# Altium PCB e3_tp2_ej4.PcbDoc
Units mm, origin at the board's own origin, x right, y up, seen from the top; angles counter-clockwise.
Board outline 50.04 x 50 mm, 2 copper layers (Top Layer, Bottom Layer); 18 components, 15 nets, 60 pads, 0 vias.
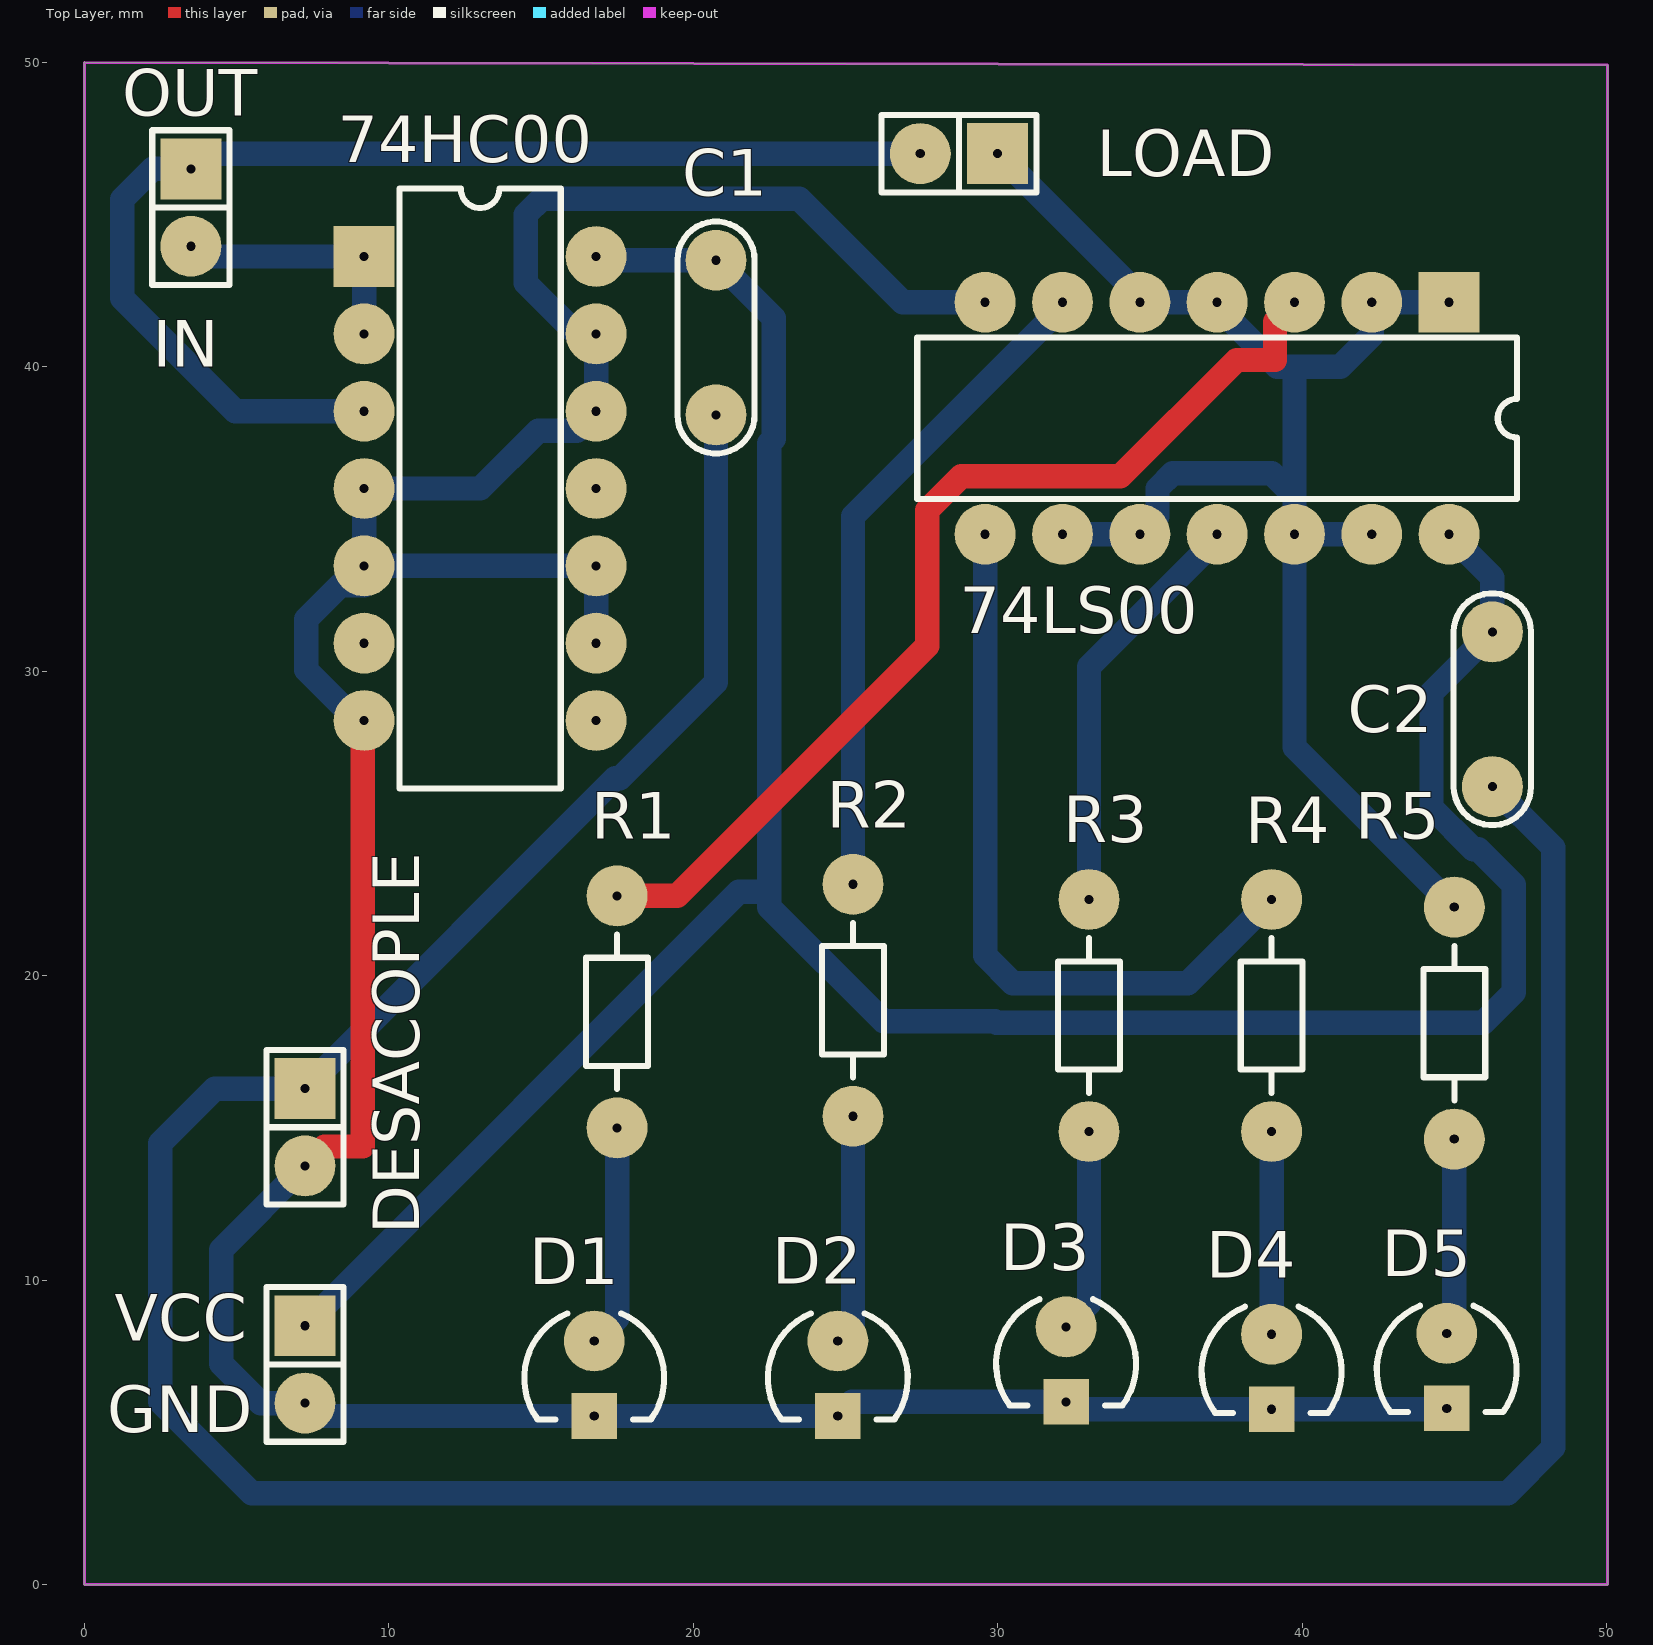
[diagram p0: Top Layer view]
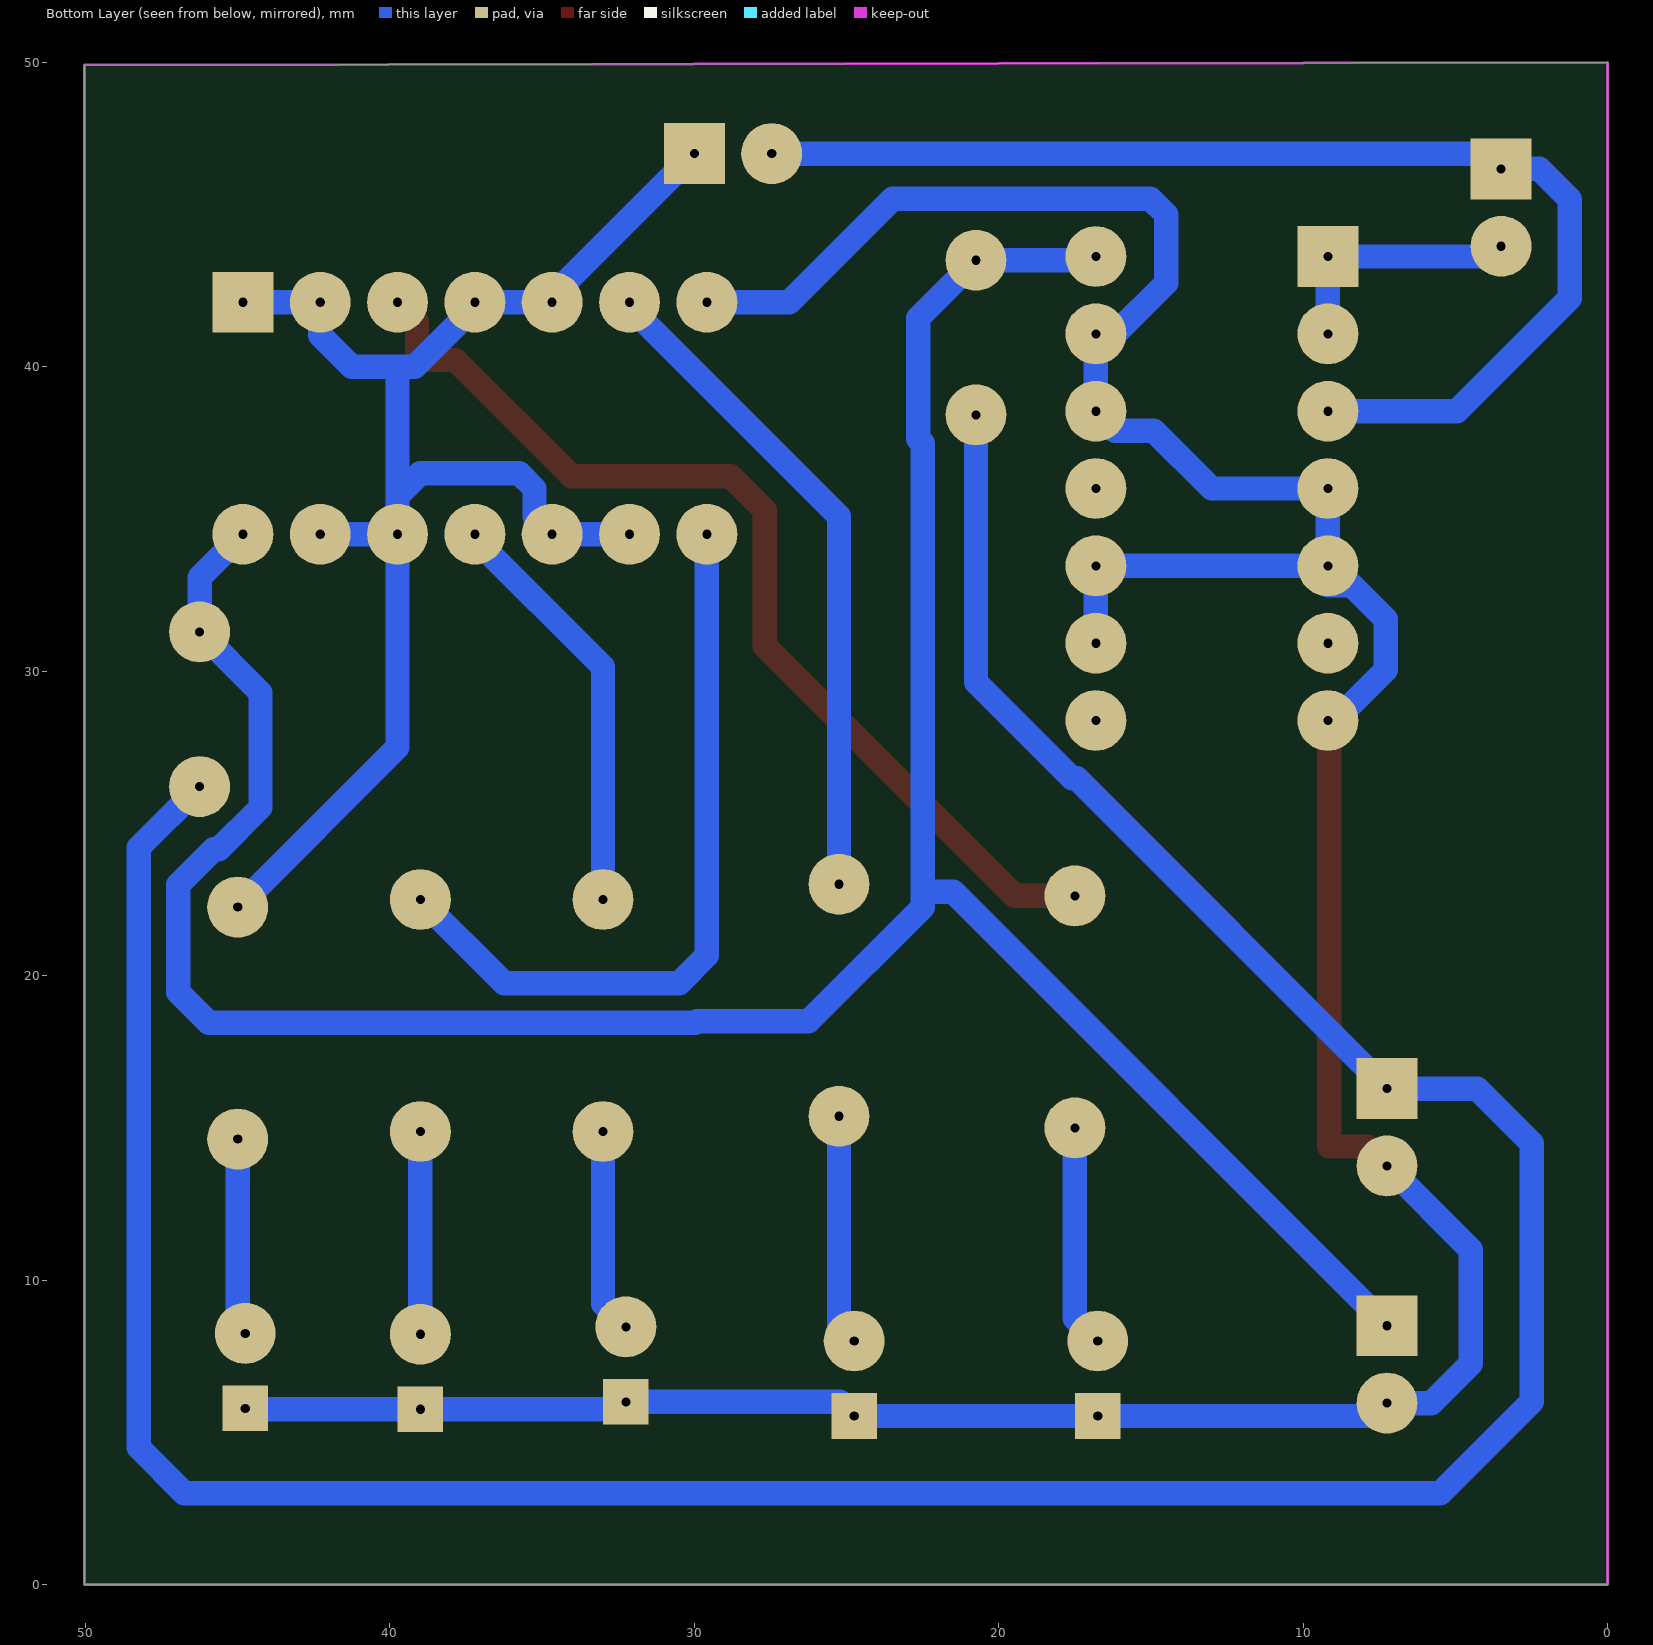
[diagram p1: Bottom Layer view, seen from below]
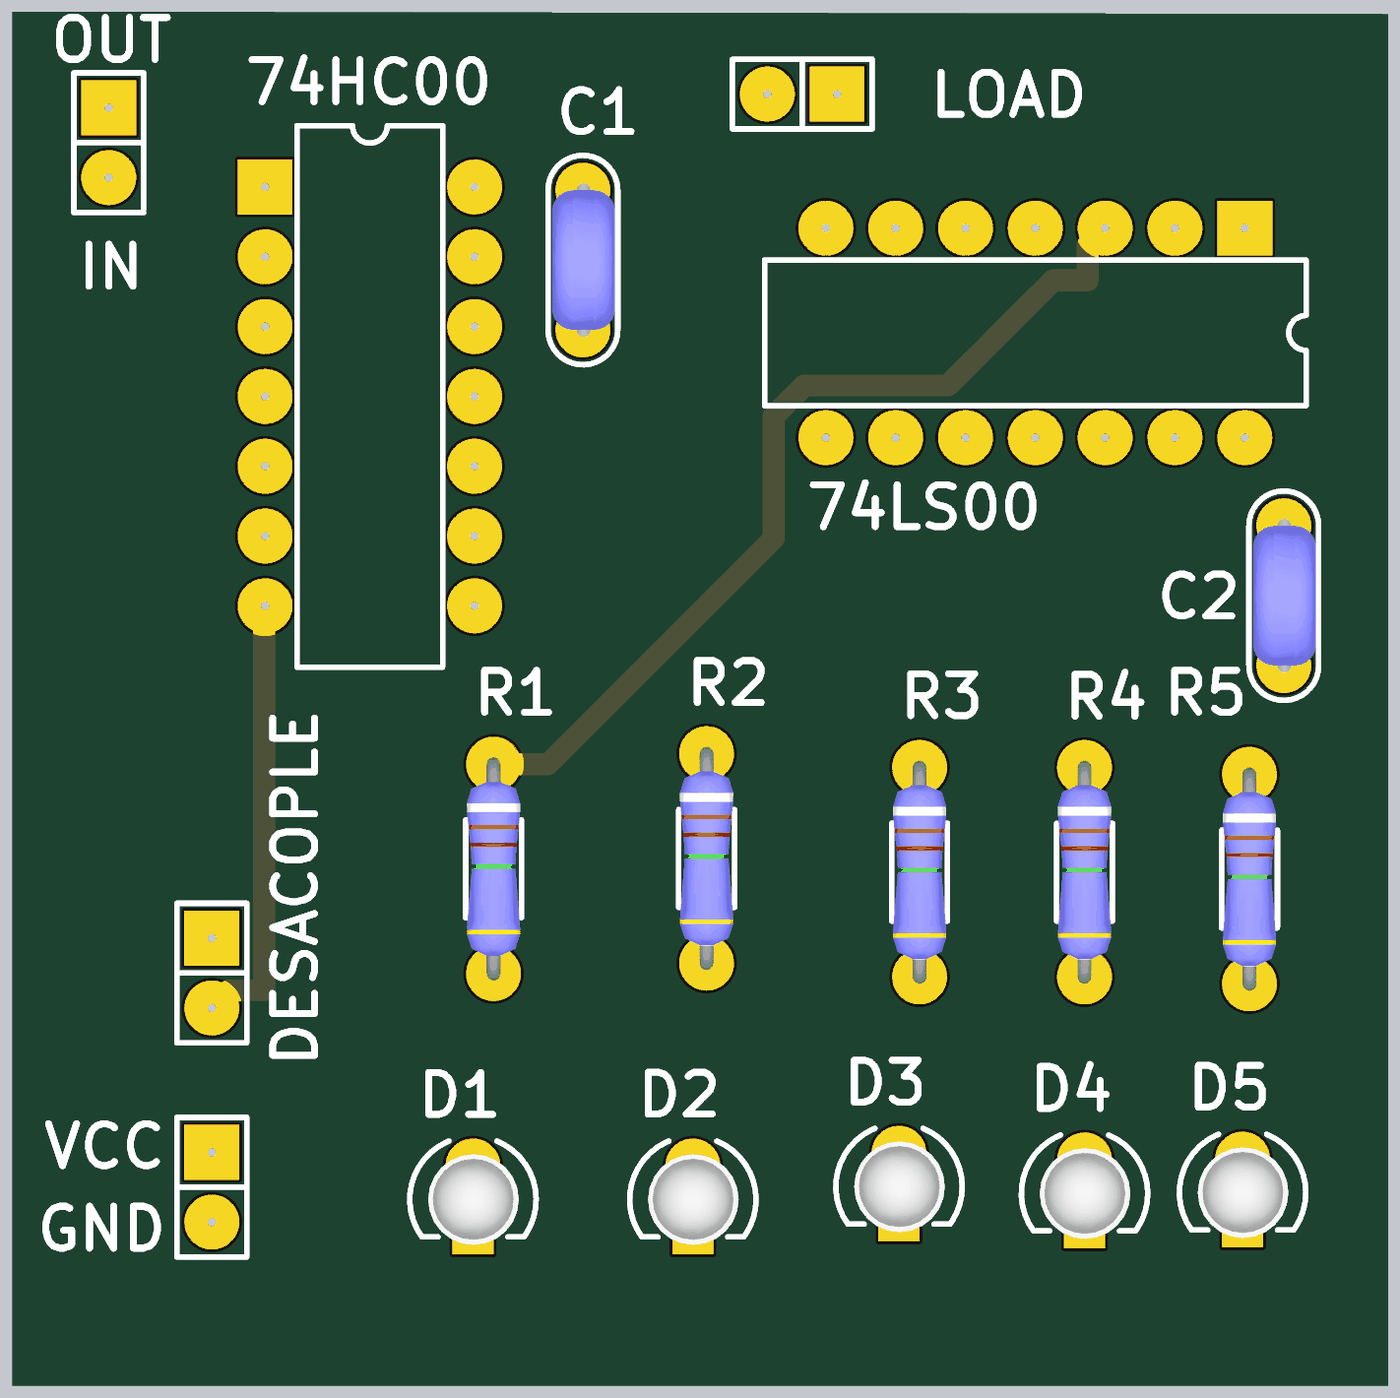
[diagram p2: 3D render of the assembled board from above, using the file's embedded part models]

## Layer stack, top to bottom
Top Solder: solder mask 0.0102, Solder Resist, Dk 3.5
Top Layer: signal copper 0.0356
Dielectric 1: dielectric 0.32, FR-4, Dk 4.8
Bottom Layer: signal copper 0.0356
Bottom Solder: solder mask 0.0102, Solder Resist, Dk 3.5

## Board outline
0,50 0,0 50.038,0 50.038,49.911

## Design rules (kind name [scope] priority, off if disabled: settings)
Clearance [All] p1: gap=0.5 ignorepadtopadclearanceinfootprint=FALSE
PolygonConnect [All] p1: connectstyle=Relief reliefconductorwidth=0.254 reliefentries=4 polygonreliefangle="90 Angle" airgapwidth=0.254
RoutingVias [All] p1: holewidth=0.711 width=1.27 viastyle="Through Hole" minholewidth=0.711 minwidth=1.27 maxholewidth=0.711 maxwidth=1.27
SolderMaskExpansion [All] p1: expansion=0.102
Width [All] p1: maxlimit=0.8 minlimit=0.8 preferedwidth=0.8
30 further rules are at their usual default settings.

## Components (designator, comment, footprint, x,y, rotation, side; value= is the part's Value field where it differs from the comment)
74HC00 "MC74HC00AN" 646-06 13,36 r270 top (schematic designator U1)
74LS00 "SN74LS00N" 646-06 37.21,38.31 r180 top (schematic designator U2)
C1 "CAP" CAP200 20.75,40.96 r90 top
C2 "CAP" CAP200 46.25,28.75 r90 top
D1 "LED" LED3 16.75,6.781 r270 top
D2 "LED" LED3 24.75,6.781 r270 top
D3 "LED" LED3 32.25,7.245 r270 top
D4 "LED" LED3 39,7 r270 top
D5 "LED" LED3 44.75,7.031 r270 top
DESACOPLE "CON2" SIP2 7.25,15.02 r270 top
IN "CON2" SIP2 3.5,45.23 r270 top (schematic designator INOUT)
LOAD "CON3" SIP2 28.73,47 r180 top (schematic designator OUT)
R1 "RES" RES300 17.5,22.62 r270 top
R2 "RES" RES300 25.25,23 r270 top
R3 "RES" RES300 33,22.5 r270 top
R4 "RES" RES300 39,22.5 r270 top
R5 "RES" RES300 45,22.25 r270 top
VCC "CON2" SIP2 7.25,7.23 r270 top (schematic designator ALIMENTACION)

## Footprints (in the part's own frame and the unit in brackets; to place one, negate y for a bottom-side part, rotate by r counter-clockwise, add the part's x,y. Pads: shape width x height; smd on the part's side, far side on the other; paste and mask are expansions set on the pad)
646-06 [mm] "DIP; 14 Leads; Row Spacing 7.62 mm; Pitch 2.54 mm"
  rect 2x2 hole 0.3: 1(-7.62,-3.81)
  round 2 hole 0.3: 2(-5.08,-3.81) 3(-2.54,-3.81) 4(0,-3.81) 5(2.54,-3.81) 6(5.08,-3.81) 7(7.62,-3.81) 8(7.62,3.81) 9(5.08,3.81) 10(2.54,3.81) 11(0,3.81) 12(-2.54,3.81) 13(-5.08,3.81) 14(-7.62,3.81)
  silkscreen extent -9.85,-2.65 9.85,2.65
CAP200 [mm]
  round 2 hole 0.3: 1(-2.54,0) 2(2.54,0)
  silkscreen extent -3.81,-1.27 3.81,1.27, body extent -2.79,-1.17 2.79,1.12, height 6.24
LED3 [mm]
  round 2 hole 0.3: 1(-1.219,0)
  rect 1.5x1.5 hole 0.3: 2(1.245,0)
  silkscreen extent -2.13,-2.3 1.36,2.3, body extent -1.65,-1.63 1.65,1.66, height 0.49
RES300 [mm]
  round 2 hole 0.3: 1(0,0) 2(7.62,0)
  silkscreen extent 1.27,-1.02 6.35,1.02, body extent -0.25,-0.97 7.87,0.97, height 2.01
SIP2 [mm]
  rect 2x2 hole 0.3: 1(-1.27,0)
  round 2 hole 0.3: 2(1.27,0)
  silkscreen extent -2.54,-1.27 2.54,1.27

## Part data
74HC00 74LS00: "Quad 2-Input NAND Gate", ComponentLink1Description="Manufacturer Link", ComponentLink1URL=http://www.onsemi.com/, ComponentLink2Description=Datasheet, PackageDescription="DIP; 14 Leads; Row Spacing 7.62 mm; Pitch 2.54 mm", PackageReference=646-06, PackageVersion=1995, Published=15-Apr-2002, Publisher="Altium Limited"
  74HC00: ComponentLink2URL=http://www.onsemi.com/pub/Collateral/MC74HC00A-D.PDF, DatasheetVersion=Mar-2000
  74LS00: ComponentAvailability="Not for New Design", ComponentLink2URL=http://www.onsemi.com/pub/Collateral/SN74LS00-D.PDF, DatasheetVersion=Dec-1999
LOAD: library part CON2

## Nets (pads, with @x,y where several pads share a name; then routed paths per layer and width w, separated by ;. In a path a pad name is that pad's centre, name@x,y a point inside that pad or via, vN(x,y) a via of type N, cw(c..) or ccw(c..) an arc to the next point about the centre after c; other vN are vias at no path point)
GND: 74HC00.4 74HC00.5 74HC00.7 74HC00.9 74HC00.10 74HC00.12 74HC00.13 74LS00.7 D1.2 D2.2 D3.2 D4.2 D5.2 DESACOPLE.2 VCC.2 | length 118.2
  Top Layer w0.8: DESACOPLE.2 7.89,14.39 9.15,14.39 9.15,28.34 74HC00.7
  Bottom Layer w0.8: DESACOPLE.2 4.5,11 4.5,7.25 5.79,5.96 VCC.2 7.674,5.536 D1.2 D2.2 25.214,6 D3.2 32.495,5.755 D4.2 44.719,5.755 D5.2 ; 74HC00.7 8.95,28.38 7.29,30.04 7.29,31.707 8.403,32.82 9.19,32.82 74HC00.5 ; 74HC00.9 74HC00.10 74HC00.5 ; 74LS00.7@29.59,42.09 74LS00.7 26.88,42.12 23.48,45.52 15.02,45.52 14.5,45 14.5,42.75 16.17,41.08 74HC00.13 74HC00.12 16.17,37.9 14.91,37.9 13.01,36 74HC00.4 74HC00.5
IN: 74HC00.1 74HC00.2 IN.2 | length 8.4
  Bottom Layer w0.8: IN.2 3.84,43.62 74HC00.1 74HC00.2
NetC1_1: C1.1 C2.1 DESACOPLE.1 | length 112
  Bottom Layer w0.8: C1.1 20.75,29.633 17.597,26.48 17.44,26.48 DESACOPLE.1 4.29,16.29 2.5,14.5 2.5,6 5.5,3 46.75,3 48.25,4.5 48.25,24.21 C2.1
NetD1_1: D1.1 R1.2 | length 7.3
  Bottom Layer w0.8: D1.1 17.5,8.75 R1.2
NetD2_1: D2.1 R2.2 | length 7.6
  Bottom Layer w0.8: D2.1 25.25,8.5 R2.2
NetD3_1: D3.1 R3.2 | length 6.7
  Bottom Layer w0.8: D3.1 33,9.214 R3.2
NetD4_1: D4.1 R4.2 | length 6.7
  Bottom Layer w0.8: D4.1 R4.2
NetD5_1: D5.1 R5.2 | length 6.5
  Bottom Layer w0.8: D5.1 45,8.5 R5.2
NetOUT_1: 74LS00.1 74LS00.2 74LS00.4 74LS00.5 74LS00.9 74LS00.10 74LS00.12 74LS00.13 LOAD.1 R5.1 | length 51.3
  Bottom Layer w0.8: LOAD.1 34.67,42.33 74LS00.5 74LS00.4 37.21,41.973 39.183,40 40,40 ; 74LS00.9 74LS00.10 35.25,35.08 35.25,36 35.75,36.5 39,36.5 39.75,35.75 ; 74LS00.13 74LS00.12 ; 74LS00.1 74LS00.2 42.29,41.04 41.25,40 40,40 ; R5.1 39.75,27.5 74LS00.12 ; 74LS00.12 39.75,35.75 ; 39.75,35.75 39.75,39.75 40,40
NetR1_1: 74LS00.3 R1.1 | length 33.7
  Top Layer w0.8: R1.1 19.48,22.62 27.69,30.83 27.69,35.287 28.803,36.4 34.03,36.4 37.85,40.22 39.11,40.22 39.11,41.48 74LS00.3
NetR2_1: 74LS00.6 R2.1 | length 22
  Bottom Layer w0.8: R2.1 25.25,35.093 32.13,41.973 74LS00.6
NetR3_1: 74LS00.11 R3.1 | length 13.7
  Bottom Layer w0.8: R3.1 33,30.143 37.21,34.353 74LS00.11
NetR4_1: 74LS00.8 R4.1 | length 24.8
  Bottom Layer w0.8: 74LS00.8 29.59,20.66 30.5,19.75 36.25,19.75 R4.1
OUT: 74HC00.3 IN.1 LOAD.2 | length 39.6
  Bottom Layer w0.8: 74HC00.3 4.96,38.54 1.25,42.25 1.25,45.5 2.25,46.5 IN.1 4,47 LOAD.2
VCC: 74HC00.14 74LS00.14 C1.2 C2.2 VCC.1 | length 91.4
  Bottom Layer w0.8: VCC.1 21.5,22.75 22.5,22.75 ; 74HC00.14 16.93,43.5 C1.2 22.65,41.6 22.65,37.633 22.5,37.483 22.5,22.75 ; 74LS00.14 46.25,33.08 C2.2 44.25,29.29 44.25,25.523 45.623,24.15 45.787,24.15 46.95,22.987 46.95,19.45 45.95,18.45 29.962,18.45 29.912,18.5 26.25,18.5 22.5,22.25 22.5,22.75
pads on no net: 74HC00.6 74HC00.8 74HC00.11

## Keep-outs
Keep-Out Layer:
  the board outline again, w0.1

## Silkscreen, mask and mechanical layers (free items; w line width, h text height)
Top Overlay:
  text "OUT" at 1.25,48.25 h1.52
  text "GND" at 0.75,5 h1.52